# Altium PCB TMC2160_BOB_V1_0.PcbDoc
Units mil, origin at the board's own origin, x right, y up, seen from the top; angles counter-clockwise.
Board outline 1500 x 1100 mil, 4 copper layers (Top, GND, VM, Bottom), stack 63.504 mil thick; 46 components, 52 nets, 171 pads, 147 vias.
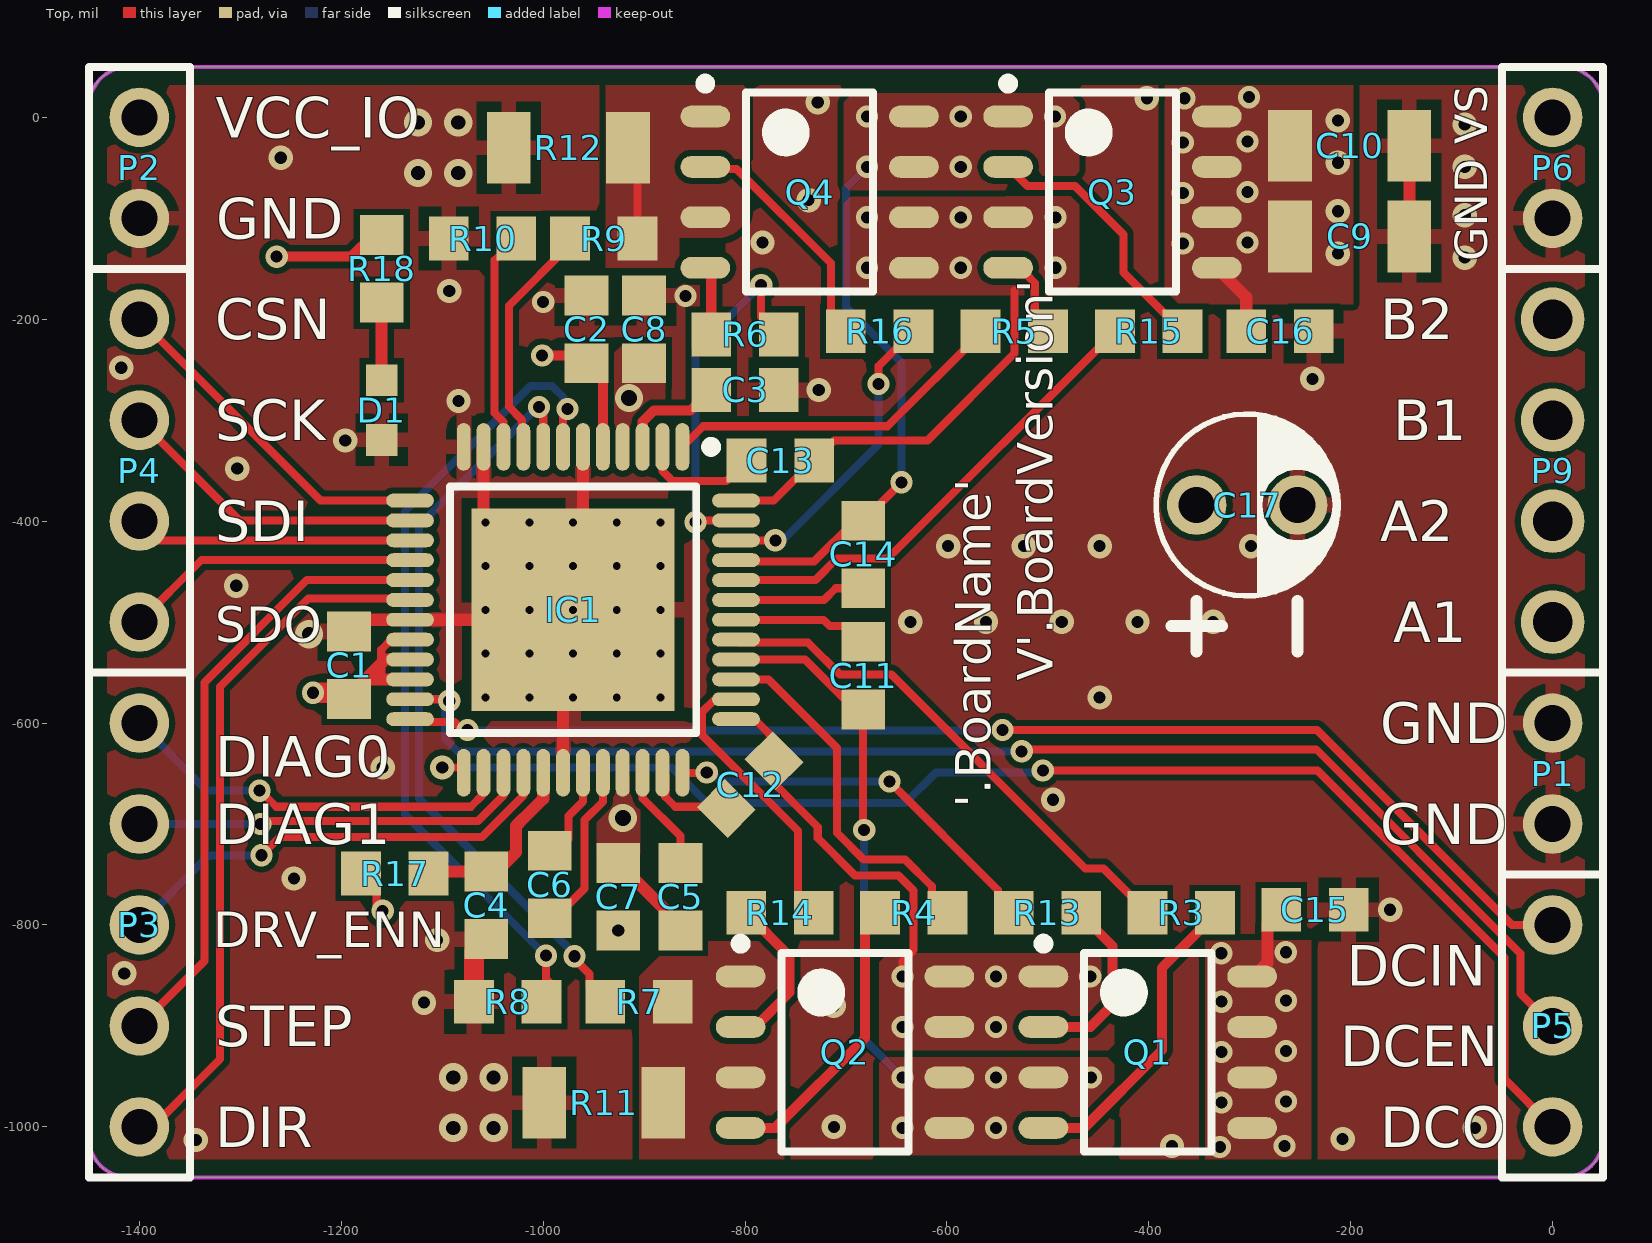
[diagram p0: Top view]
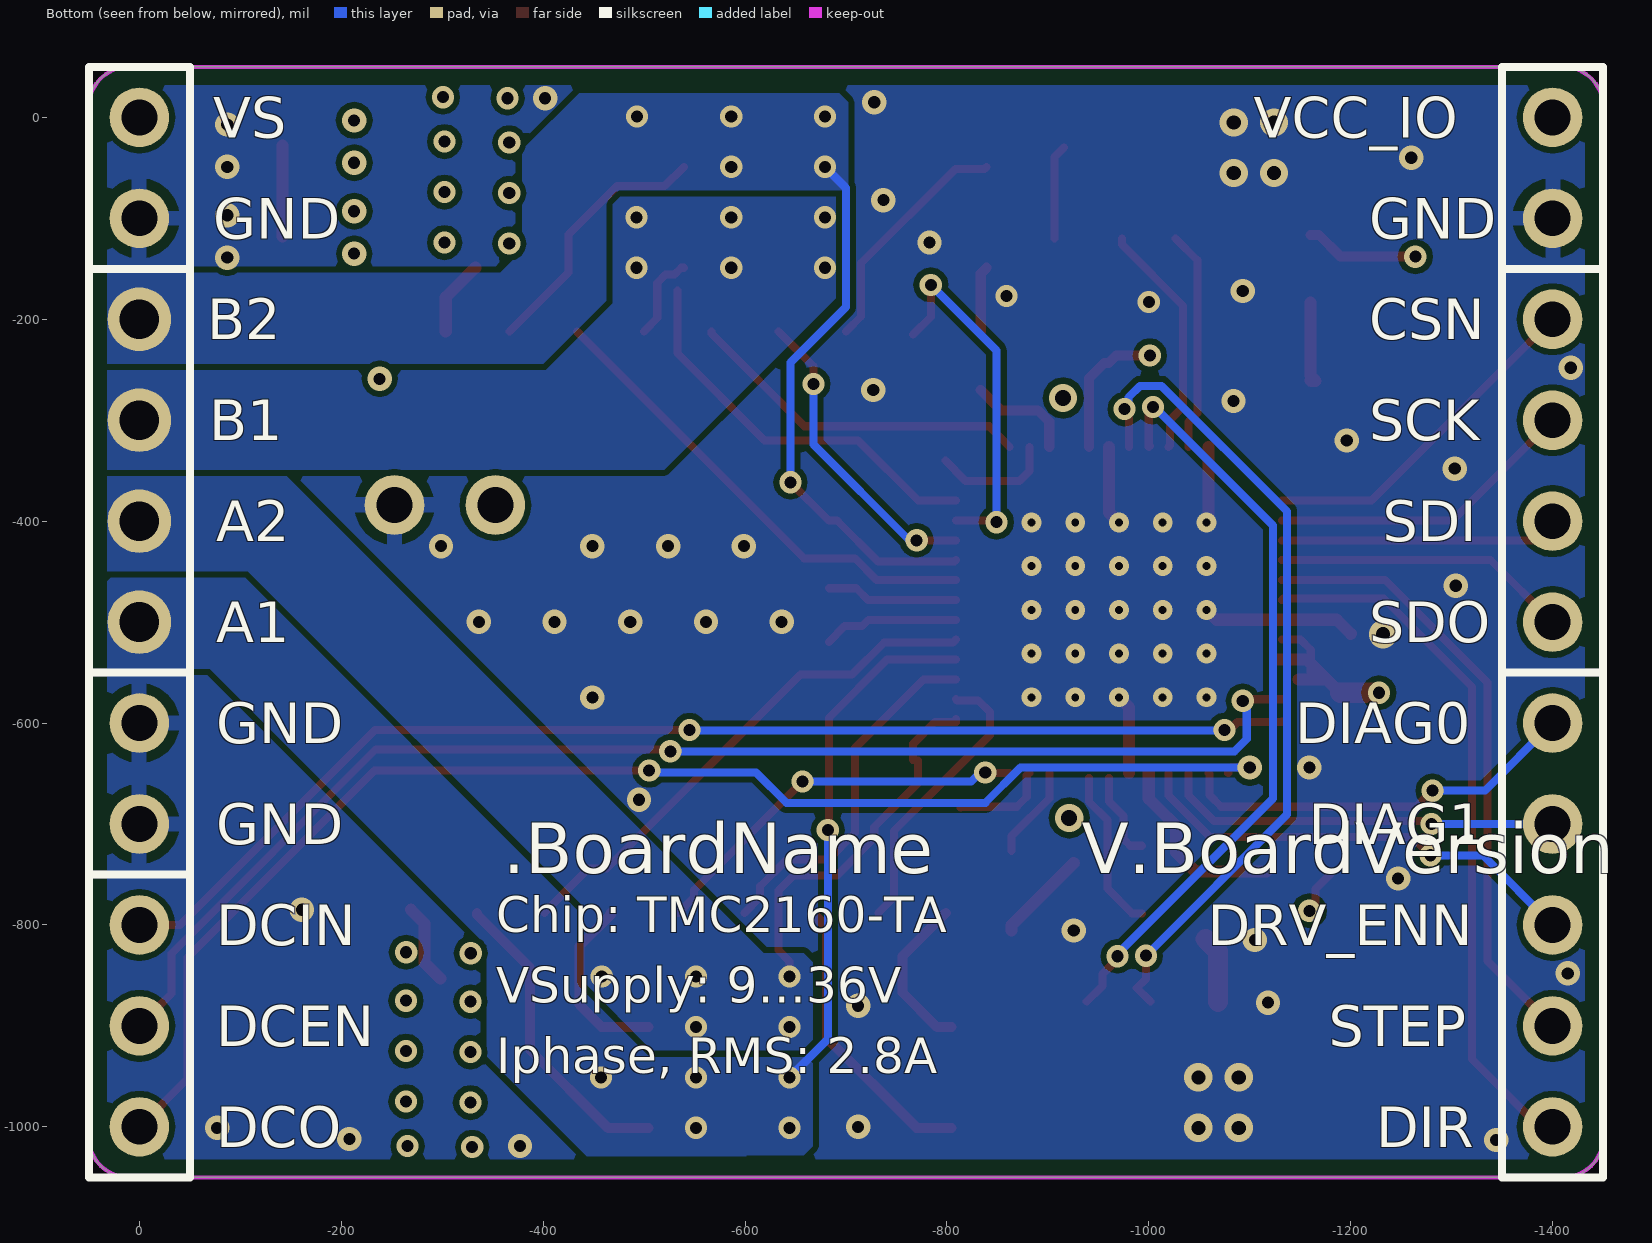
[diagram p1: Bottom view, seen from below]
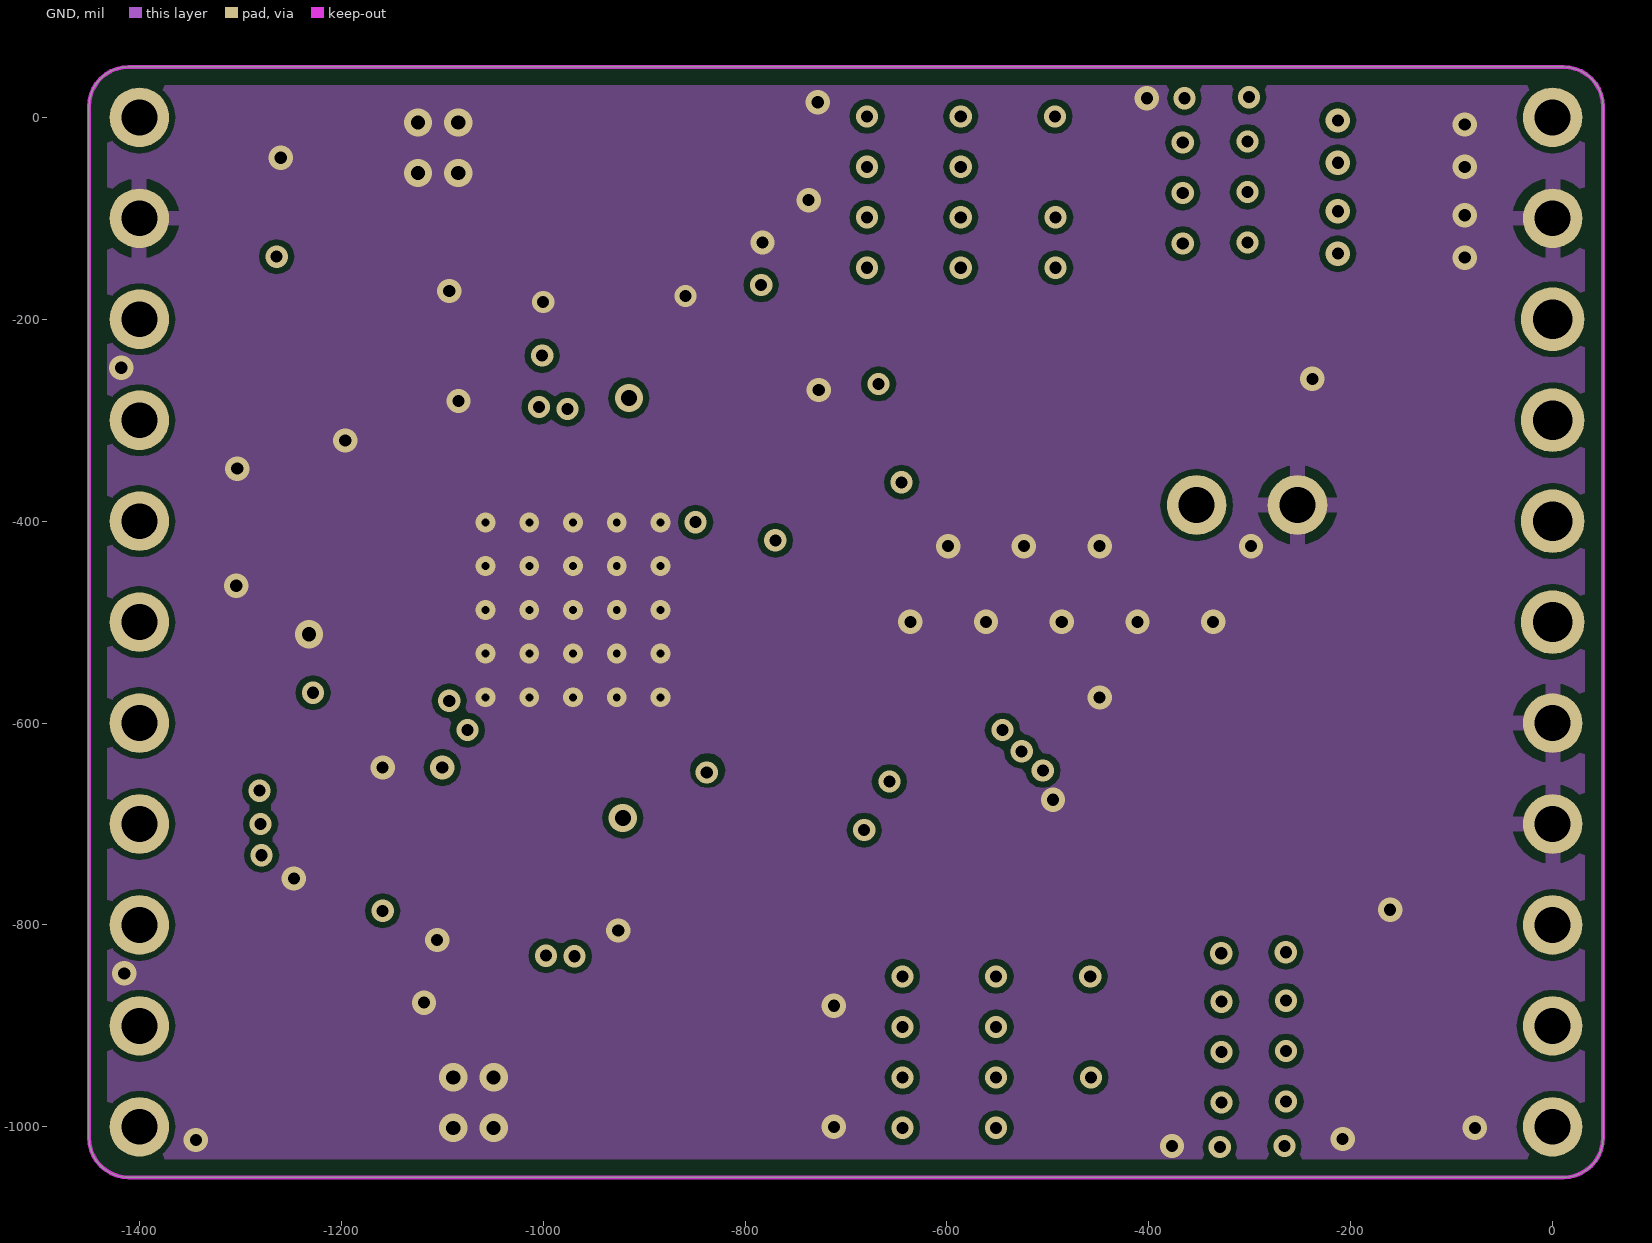
[diagram p2: GND]
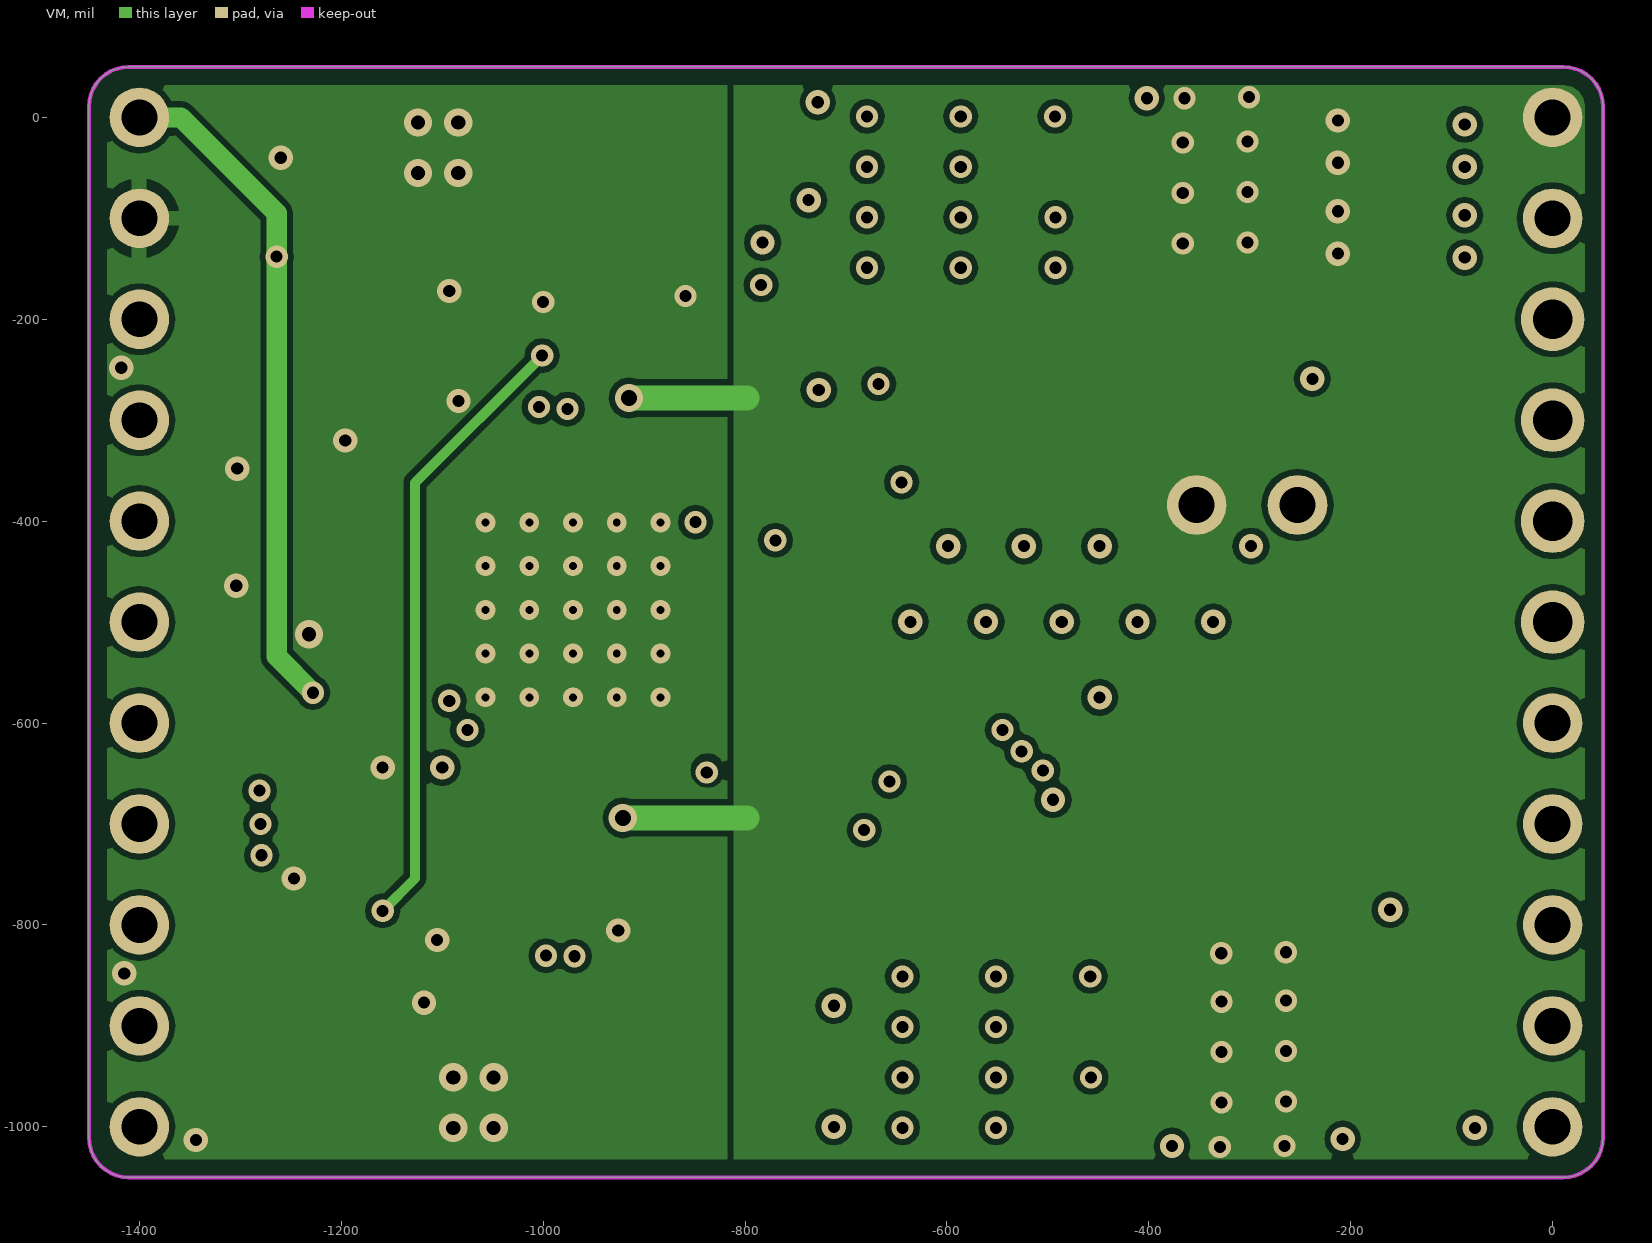
[diagram p3: VM]
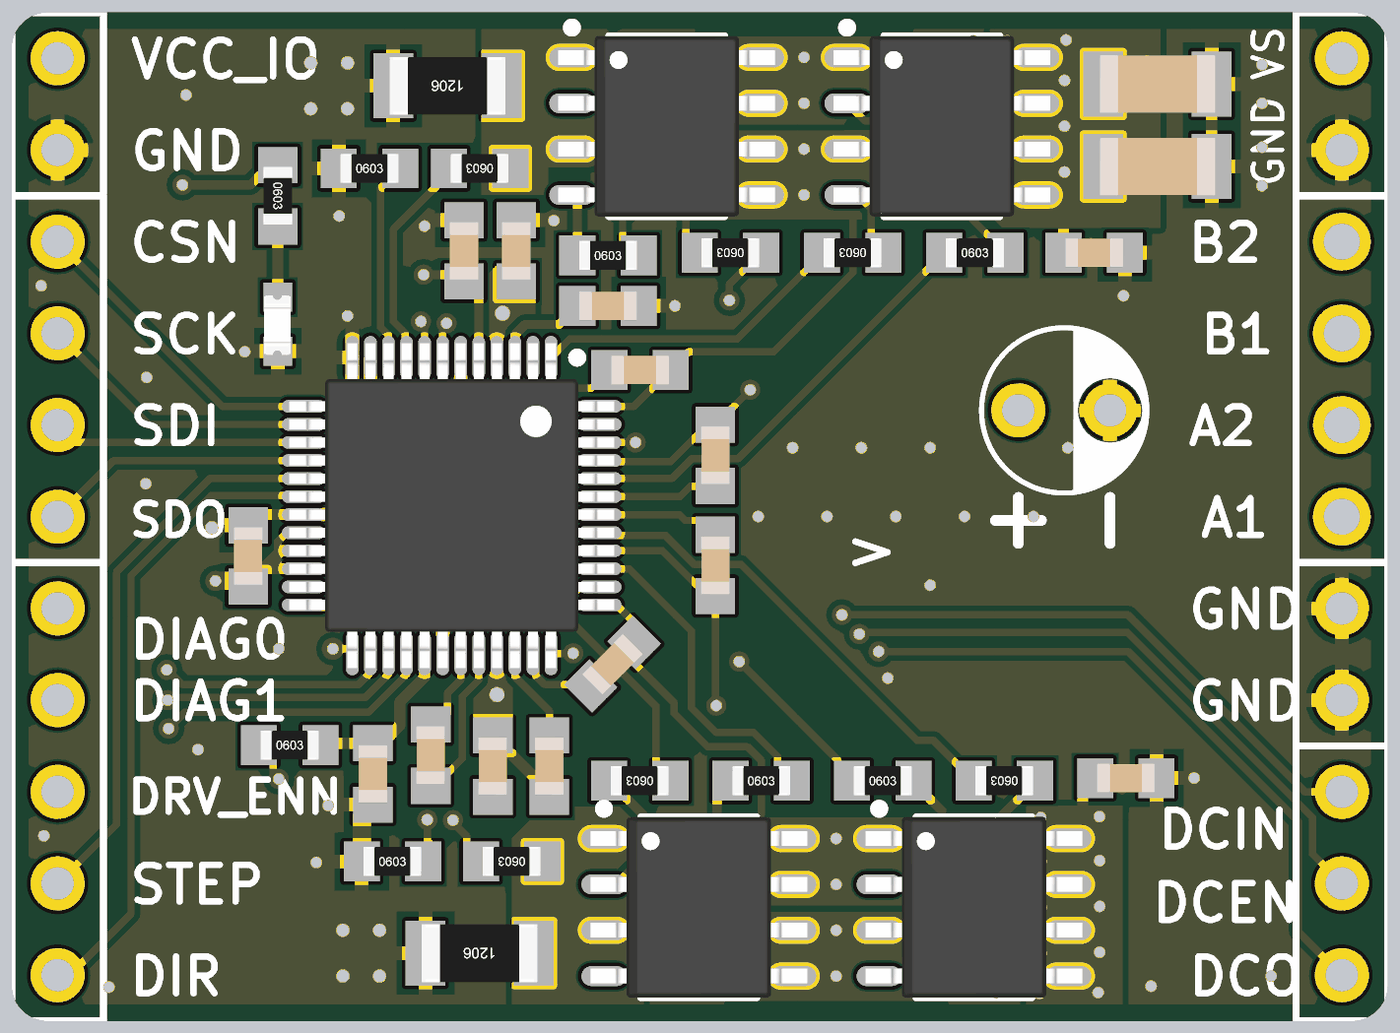
[diagram p4: 3D render of the assembled board from above, using the file's embedded part models]

## Layer stack, top to bottom
Top Solder: solder mask 0.4, Solder Resist, Dk 3.5
Top: signal copper 0.689
Dielectric 1: core 10, FR-4, Dk 4.8
GND: signal copper 1.378
Dielectric 2: prepreg 39.3701, FR-4, Dk 4.2
VM: signal copper 1.378
Dielectric4: core 10, FR-4, Dk 4.2
Bottom: signal copper 0.689
Bottom Solder: solder mask 0.4, Solder Resist, Dk 3.5

## Board outline
-1450,-1010.63 ccw(c-1410.63,-1010.63) -1410.63,-1050 10.63,-1050 ccw(c10.63,-1010.63) 50,-1010.63 50,10.63 ccw(c10.63,10.63) 10.63,50 -1410.63,50 ccw(c-1410.63,10.63) -1450,10.63

## Design rules (kind name [scope] priority, off if disabled: settings)
Clearance BoardOutlineClearance [OnLayer('Keep-Out Layer')] p1: gap=15.75 ignorepadtopadclearanceinfootprint=FALSE except(0: Arc-Hole Track-Hole SMDPad-Hole THPad-Hole Via-Hole Fill-Hole Poly-Hole Region-Hole Text-Hole)
Clearance "Fiducial Clearance" [HasFootprint('FIDUCIAL_40MIL')] p2: gap=26 ignorepadtopadclearanceinfootprint=FALSE except(0: Arc-Hole Track-Hole SMDPad-Hole THPad-Hole Via-Hole Fill-Hole Poly-Hole Region-Hole Text-Hole)
Clearance "Mounting Hole Clearance" [(HoleDiameter >= 110) And  IsPad  And ((PadYSize_AllLayers - HoleDiameter)  <=  1)] p3: gap=30 ignorepadtopadclearanceinfootprint=FALSE except(0: Arc-Hole Track-Hole SMDPad-Hole THPad-Hole Via-Hole Fill-Hole Poly-Hole Region-Hole Text-Hole)
Clearance [All] p4: gap=6 ignorepadtopadclearanceinfootprint=TRUE except(0: Arc-Hole Track-Hole SMDPad-Hole THPad-Hole Via-Hole Fill-Hole Poly-Hole Region-Hole Text-Hole)
ComponentClearance Pinheader2PinheaderClearance [InComponentClass('Pinheader') vs InComponentClass('Pinheader')] p1: gap=0 collisioncheckmode=3 verticalgap=0 showdistances=FALSE
ComponentClearance [All] p2: gap=0 collisioncheckmode=3 verticalgap=100000 showdistances=FALSE
DiffPairsRouting [All] p1 off: maxlimit=10 minlimit=7.5 mostfreqgap=10 toplayer_prefgap=7.5 toplayer_minwidth=7.5 toplayer_maxwidth=7.5 toplayer_prefwidth=7.5 midlayer1_prefgap=7.5 midlayer1_minwidth=7.5 midlayer1_maxwidth=7.5 midlayer1_prefwidth=7.5 midlayer2_mingap=10 midlayer2_minwidth=15 midlayer2_maxwidth=15 midlayer2_prefwidth=15 bottomlayer_prefgap=7.5 bottomlayer_minwidth=7.5 bottomlayer_maxwidth=7.5 bottomlayer_prefwidth=7.5 maxuncoupledlength=500
HoleSize [All] p1: absolutevalues=TRUE maxlimit=100000 minlimit=7.87 maxpercent=80.000 minpercent=20.000
HoleToHoleClearance [All] p1: gap=8 allowstackedmicrovias=TRUE
MatchedLengths "SD_CARD MatchedLengths" [InNetClass('SD_CARD')] p1: tolerance=10 checknetsindiffpair=FALSE checkdiffpairvsdiffpair=TRUE checkxsignals=TRUE checkothers=TRUE
MinimumAnnularRing MinimumViaAnnualRing [All] p1: minimumring=4.92
MinimumSolderMaskSliver STM32_MinimumSolderMaskSliver [(InComponent('STM1') AND InComponent('STM2')) vs (InComponent('STM1') AND InComponent('STM2'))] p1: minsoldermaskwidth=1
MinimumSolderMaskSliver USB_HUB_MinimumSolderMaskSliver [InComponent('USB_HUB')] p2: minsoldermaskwidth=1
MinimumSolderMaskSliver [All] p3 off: minsoldermaskwidth=1.5
PasteMaskExpansion TestPadPasteMaskExpansion [HasFootprint('SMD_TP_2X2_ROUND')] p1: expansion=-78.74
PasteMaskExpansion [All] p2: expansion=0
PolygonConnect SA_SB_PolygonConnect [InNet('SA') OR InNet('SB')] p1: connectstyle=Direct reliefconductorwidth=70 reliefentries=4 polygonreliefangle="90 Angle" airgapwidth=10
PolygonConnect VM_PolygonConnect [InNet('+VM')] p2: connectstyle=Direct reliefconductorwidth=70 reliefentries=4 polygonreliefangle="90 Angle" airgapwidth=10
PolygonConnect ThermalVias [IsVia] p3: connectstyle=Direct reliefconductorwidth=10 reliefentries=4 polygonreliefangle="90 Angle" airgapwidth=10
PolygonConnect MotorOutputConStyle [InNetClass('MotorPowerOut')] p4: connectstyle=Direct reliefconductorwidth=10 reliefentries=4 polygonreliefangle="90 Angle" airgapwidth=10
PolygonConnect [All] p5: connectstyle=Relief reliefconductorwidth=15 reliefentries=4 polygonreliefangle="90 Angle" airgapwidth=10
RoutingVias [All] p1: holewidth=12 width=22 viastyle="Through Hole" minholewidth=12 minwidth=22 maxholewidth=12 maxwidth=50
ShortCircuit [All] p1 off: allowed=FALSE
SilkToBoardRegionClearance [All] p1 off:
SilkToSilkClearance [All] p1 off: silktosilkclearance=10
SilkToSolderMaskClearance [IsPad] p1 off: minsilkscreentomaskgap=10 clearancetoexposedcopper=TRUE
SolderMaskExpansion FiducialSolderMaskExpansion [HasFootprint('FIDUCIAL_40MIL')] p1: expansion=26
SolderMaskExpansion [All] p2: expansion=4
UnRoutedNet [All] p1 off:
Width VIN_Width [InNetClass('PWR_VIN')] p1: maxlimit=300 minlimit=200 preferedwidth=210
Width Other_Width [All] p2: maxlimit=100000 minlimit=8 preferedwidth=11.81 minimp=50.000000 maximp=50.000000 favimp=50.000000
19 further rules are at their usual default settings.

## Classes and differential pairs
net class MotorPowerOut: BMA1 BMA2 BMB1 BMB2

## Components (designator, comment, footprint, x,y, rotation, side; value= is the part's Value field where it differs from the comment)
C1 "100nF" C0603 -1192.26,-542.78 r90 top
C2 "2u2" C0603 -957,-210 r90 top
C3 "2u2" C0603 -800,-270 r180 top
C4 "470nF" C0603 -1056.33,-780.54 r270 top
C5 "100nF" C0603 -864,-772 r90 top
C6 "22nF" C0603 -993.33,-760 r270 top
C7 "100nF" C0603 -925.67,-772 r270 top
C8 "100nF" C0603 -900,-210 r90 top
C9 "10uF/50V/10%" C1206 -201,-118 r180 top
C10 "10uF/50V/10%" C1206 -201,-28 r180 top
C11 "220nF" C0603 -683,-553 r270 top
C12 "220nF" C0603 -795.06,-661 r45 top
C13 "220nF" C0603 -765,-340 r0 top
C14 "220nF" C0603 -683,-433 r90 top
C15 "470nF/50V" C0603 -235.46,-785 r0 top
C16 "470nF/50V" C0603 -270,-212 r0 top
C17 "Cap Pol1" EXT_POL_CAP -352.68,-384 r270 top value="ELKO 100uF/low-ESR"
D1 "LED, Blue, SMD, 20mA, 2.8V, 465 nm" LED_0603 -1160,-290 r270 top
IC1 "TMC2160-TA" TMC5160_TSQFP50P900X900X120_HS-49L -970.42,-487.87 r270 top
P1 "GND" 2_PIN_THT 0,-700 r0 top
P2 "VCC_IO" 2_PIN_THT -1400,-100 r0 top
P3 "MISC" 5_PIN_THT -1400,-1000 r0 top
P4 "SPI" 4_PIN_THT -1400,-200 r180 top
P5 "DCSTEP" 3_PIN_THT 0,-1000 r0 top
P6 "VM" 2_PIN_THT 0,-100 r0 top
P9 "MAB" 4_PIN_THT_1mm_hole 0,-200 r180 top
Q1 "AO4882" SOP127P600X170-8L -401.03,-926 r0 top
Q2 "AO4882" SOP127P600X170-8L -701.03,-926 r0 top
Q3 "AO4882" SOP127P600X170-8L -436.03,-74 r0 top
Q4 "AO4882" SOP127P600X170-8L -736.03,-74 r0 top
R3 "22R / 100mW / 1%" R0603 -367.97,-788 r180 top
R4 "22R / 100mW / 1%" R0603 -632.96,-788 r0 top
R5 "22R / 100mW / 1%" R0603 -533.33,-212 r180 top
R6 "22R / 100mW / 1%" R0603 -800,-215 r0 top
R7 "47R /  / 1%" R0603 -905,-876 r180 top
R8 "47R /  / 1%" R0603 -1035,-876 r0 top
R9 "47R /  / 1%" R0603 -940,-120 r180 top
R10 "47R /  / 1%" R0603 -1060,-120 r0 top
R11 "75mR" R1206 -940,-976 r180 top
R12 "75mR" R1206 -975,-30 r180 top
R13 "22R / 100mW / 1%" R0603 -500.47,-788 r0 top
R14 "22R / 100mW / 1%" R0603 -765.46,-788 r180 top
R15 "22R / 100mW / 1%" R0603 -400,-212 r0 top
R16 "22R / 100mW / 1%" R0603 -666.67,-212 r180 top
R17 "2R2/1%/" R0603 -1147,-749.04 r0 top
R18 "1k" R0603 -1160,-150 r270 top

## Footprints (in the part's own frame and the unit in brackets; to place one, negate y for a bottom-side part, rotate by r counter-clockwise, add the part's x,y. Pads: shape width x height; smd on the part's side, far side on the other; paste and mask are expansions set on the pad)
2_PIN_THT [mm]
  round 1.5 hole 0.9: 1(0,0) 2(0,2.54)
  silkscreen extent -1.27,-1.27 1.27,3.81
3_PIN_THT [mm]
  round 1.5 hole 0.9: 1(0,0) 2(0,2.54) 3(0,5.08)
  silkscreen extent -1.27,-1.27 1.27,6.35
4_PIN_THT [mm]
  round 1.5 hole 0.9: 1(0,0) 2(0,2.54) 3(0,5.08) 4(0,7.62)
  silkscreen extent -1.27,-1.27 1.27,8.89
4_PIN_THT_1mm_hole [mm]
  round 1.6 hole 1: 1(0,0) 2(0,2.54) 3(0,5.08) 4(0,7.62)
  silkscreen extent -1.27,-1.27 1.27,8.89
5_PIN_THT [mm]
  round 1.5 hole 0.9: 1(0,0) 2(0,2.54) 3(0,5.08) 4(0,7.62) 5(0,10.16)
  silkscreen extent -1.27,-1.27 1.27,11.43
C0603 [mm] "0603 ceramic capacitor"
  rect 1x1.1 smd: 1(-0.85,0) 2(0.85,0)
  body extent -0.8,-0.4 0.8,0.4, height 0.8
C1206 [mm] "1206 ceramic capacitor"
  rect 1.1x1.8 smd: 1(-1.5,0) 2(1.5,0)
  body extent -1.6,-0.8 1.6,0.8, height 0.76
EXT_POL_CAP [mm]
  round 1.5 hole 0.9: 1(0,0) 2(0,2.54)
  silkscreen extent -2.29,-1.02 3.68,3.56
LED_0603 [mm]
  rect 0.8x0.8 smd: 1(-0.75,0) 2(0.75,0)
  body extent -0.8,-0.38 0.85,0.35, height 0.68
R0603 [mm] "0603 resistor"
  rect 1x1.1 smd: 1(-0.85,0) 2(0.85,0)
  body extent -0.8,-0.4 0.8,0.4, height 0.45
R1206 [mm] "1206 resistor"
  rect 1.1x1.8 smd: 1(-1.5,0) 2(1.5,0)
  body extent -1.6,-0.8 1.6,0.8, height 0.6
SOP127P600X170-8L [mm] "SOP, 8-Leads, Body 4,90x3,90mm, Pitch 1,27mm, IPC High Density"
  oval 1.25x0.55 smd: 1(-2.625,1.905) 2(-2.625,0.635) 3(-2.625,-0.635) 4(-2.625,-1.905) 5(2.625,-1.905) 6(2.625,-0.635) 7(2.625,0.635) 8(2.625,1.905)
  silkscreen extent -2.75,-2.5 1.6,2.85, body extent -3,-2.5 3,2.5, height 1.7
TMC5160_TSQFP50P900X900X120_HS-49L [mm] "TSQFP, 48-Leads, Body 7,00x7,00mm, Pitch 0,50mm, Thermal Pad 5,10x5,10mm, IPC High Density"
  oval 1.2x0.35 smd mask+0.102: 1(-4.1,2.75) 2(-4.1,2.25) 3(-4.1,1.75) 4(-4.1,1.25) 5(-4.1,0.75) 6(-4.1,0.25) 7(-4.1,-0.25) 8(-4.1,-0.75) 9(-4.1,-1.25) 10(-4.1,-1.75) 11(-4.1,-2.25) 12(-4.1,-2.75) 25(4.1,-2.75) 26(4.1,-2.25) 27(4.1,-1.75) 28(4.1,-1.25) 29(4.1,-0.75) 30(4.1,-0.25) 31(4.1,0.25) 32(4.1,0.75) 33(4.1,1.25) 34(4.1,1.75) 35(4.1,2.25) 36(4.1,2.75)
  oval 0.35x1.2 smd mask+0.102: 13(-2.75,-4.1) 14(-2.25,-4.1) 15(-1.75,-4.1) 16(-1.25,-4.1) 17(-0.75,-4.1) 18(-0.25,-4.1) 19(0.25,-4.1) 20(0.75,-4.1) 21(1.25,-4.1) 22(1.75,-4.1) 23(2.25,-4.1) 24(2.75,-4.1) 37(2.75,4.1) 38(2.25,4.1) 39(1.75,4.1) 40(1.25,4.1) 41(0.75,4.1) 42(0.25,4.1) 43(-0.25,4.1) 44(-0.75,4.1) 45(-1.25,4.1) 46(-1.75,4.1) 47(-2.25,4.1) 48(-2.75,4.1)
  rect 5.1x5.1 smd: 49(0,0)
  silkscreen extent -4.22,-3.1 3.1,3.6, body extent -4.5,-4.5 4.5,4.5, height 1.2

## Part data
C1 C7 C8: library part Capacitor, "Ceramic capacitor", Manufacturer=Multicomp, MPN=MC0603F104M500CT, Voltage rating=50V, Capacitance=100nF, ComponentLinknDescription=Datasheet, Precision=20%, Type=MLCC
C2 C3: library part "2.2 µF, 25 V, ± 10%, X5R, GRM Series", "SMD Multilayer Ceramic Capacitor, 0603 [1608 Metric], 2.2 µF, 25 V, ± 10%, X5R, GRM Series", MPN=GRM188R61E225KA12D, Voltage rating=50V, Capacitance=2u2, ComponentLinknDescription=Datasheet, MF=MURATA, Precision=10%, Type=MLCC
C4: library part Capacitor, "Ceramic capacitor", MPN=MC0603X474K160CT, Voltage rating=16V, Capacitance=470nF, ComponentLinknDescription=Datasheet, MF=Multicomp, Precision=10%, Type=MLCC
C5: library part Capacitor, "Ceramic capacitor", MPN=MC0603F104M500CT, Voltage rating=50V, Capacitance=100nF, ComponentLinknDescription=Datasheet, MF=Multicomp, Precision=20%, Type=MLCC
C6: library part Capacitor, "Ceramic capacitor", MPN=MC0603B223K500CT, Voltage rating=50V, Capacitance=22nF, ComponentLinknDescription=Datasheet, MF=Multicomp, Precision=20%, Type=MLCC
C9 C10: library part "10 µF, 50 V, ± 20%, X5R, GRM Series", "SMD Multilayer Ceramic Capacitor, 1206 [3216 Metric], 10 µF, 50 V, ± 20%, X5R, GRM Series", Capacitance=10uF, MPN=GRM31CR61H106MA12L, VoltageRating=50V, ComponentLinknDescription=Datasheet, MF=MURATA, Precision=10%, Type=MLCC
C11 C12 C13 C14: library part "0.22 µF, 50 V, ± 10%, X7R", "SMD Multilayer Ceramic Capacitor, 0603 [1608 Metric], 0.22 µF, 50 V, ± 10%, X7R, GCM Series", MPN=GCM188R71H224KA64D, Voltage rating=50V, Capacitance=220nF, ComponentLinknDescription=Datasheet, MF=MURATA, Precision=10%, Type=MLCC
C15 C16: library part "0.47 µF, 50 V, ± 10%, X7R, C Series", "SMD Multilayer Ceramic Capacitor, 0603 [1608 Metric], 0.47 µF, 50 V, ± 10%, X7R, C Series", Capacitance=470nF, MPN=C1608X7R1H474K080AC, VoltageRating=50V, ComponentLinknDescription=Datasheet, MF=TDK, Precision=10%, Type=MLCC
C17: "Polarized Capacitor (Radial)", LatestRevisionDate=17-Jul-2002, LatestRevisionNote="Re-released for DXP Platform.", PackageDescription="Polarized Capacitor (Radial); 2 Leads", PackageReference=RB7.6-15, Published=8-Jun-2000, Publisher="Altium Limited"
D1: Colour=Blue, Current rating=20mA, MPN=LTST-C191TBKT-5A, MF=Lite-On
IC1: Manufacturer=TRINAMIC, Distributor#1=Digikey, Geometry.Height=1,2mm, MF=TRINAMIC, MPN=TMC2160-TA
P1 P2 P6: library part "Header 2", "Header, 2-Pin", ComponentClass=Pinheader, Fitted="Not fitted", LatestRevisionDate=17-Jul-2002, LatestRevisionNote="Re-released for DXP Platform.", Publisher="Altium Limited"
P3: library part "Header 5", "Header, 5-Pin", Fitted="Not fitted", LatestRevisionDate=17-Jul-2002, LatestRevisionNote="Re-released for DXP Platform.", Publisher="Altium Limited"
P4: library part "Header 4", "Header, 4-Pin", ComponentClass=Pinheader, Fitted="Not fitted", LatestRevisionDate=17-Jul-2002, LatestRevisionNote="Re-released for DXP Platform.", Publisher="Altium Limited"
P5: library part "Header 3", "Header, 3-Pin", Fitted="Not fitted", LatestRevisionDate=17-Jul-2002, LatestRevisionNote="Re-released for DXP Platform.", Publisher="Altium Limited"
P9: library part "Wire-To-Board Connector, 2.5 mm, 4 Contacts, Header, EH Series, Through Hole, 1 Rows", "Wire-To-Board Connector, 2.5 mm, 4 Contacts, Header, EH Series, Through Hole, 1 Rows", MPN=B4B-EH-A, Fitted="Not fitted", MF="JST (JAPAN SOLDERLESS TERMINALS)"
Q1 Q2 Q3 Q4: library part "AO4882 MOSFET 2N-CH 40V 8A 8SOIC", "Mosfet Array 2 N-Channel (Dual) 40V 8A 2W Surface Mount 8-SOIC", MF="Alpha & Omega Semiconductor Inc.", MPN=AO4882
R3 R4 R5 R6 R13 R14 R15 R16: library part "22 ohm, 50 V, 0603 [1608 Metric], 100 mW, ± 1%, MCWR Series", "SMD Chip Resistor, Thick Film, 22 ohm, 50 V, 0603 [1608 Metric], 100 mW, ± 1%, MCWR Series", MPN=MCWR06X22R0FTLV, PowerRating=100mW, Resistance=22R, Temp coefficient=*ppm, MF=MULTICOMP, Precision=1%
R7 R8 R9 R10: library part "47 ohm, 75 V, 0603 [1608 Metric], 100 mW, ± 1%, MCSR 06 Series", "SMD Chip Resistor, Ceramic, 47 ohm, 75 V, 0603 [1608 Metric], 100 mW, ± 1%, MCSR 06 Series", MPN=MCSR06X47R0FTL, Resistance=47R, Temp coefficient=*ppm, MF=MULTICOMP, Precision=1%
R11 R12: library part "R_SENS, 0.075 ohm, 1206, 1W, ± 1%, ERJ Series", "SMD Chip Resistor, Thick Film, Current Sense Resistors - SMD 1W 0.075ohm 1%", MPN=ERJ-8BWFR075V, PowerRating=1W, Temp coefficient=*ppm, VoltageRating=50V, MF="Panasonic Electronic Components", Precision=1%, Resistance=75mR
R17: library part Resistor, "Resistor", MPN=MC0063W060312R2, Power rating=*mW, Resistance=2R2, Temp coefficient=*ppm, Voltage rating=*V, ComponentLinknDescription=Datasheet, MF=Multicomp, Precision=1%
R18: library part "1 kohm, 50 V, 0603 [1608 Metric], 63 mW, ± 1%, MC Series", "1 kohm, 50 V, 0603 [1608 Metric], 63 mW, ± 1%, MC Series", MPN=MC0063W060311K, PowerRating=63mW, Temp coefficient=*ppm, VoltageRating=50V, MF=MULTICOMP, Precision=1%, Resistance=1k

## Via types
v1: diameter 22, hole 12, Top to Bottom, tented both sides, 65 vias
v2: diameter 24.1, hole 12, Top to Bottom, tented both sides, 29 vias
v3: diameter 19.68, hole 7.87, Top to Bottom, tented bottom, 25 vias
v4: diameter 24, hole 12, Top to Bottom, tented both sides, 17 vias
v5: diameter 28, hole 14, Top to Bottom, tented both sides, 9 vias
v6: diameter 28, hole 16, Top to Bottom, tented both sides, 2 vias

## Nets (pads, with @x,y where several pads share a name; then routed paths per layer and width w, separated by ;. In a path a pad name is that pad's centre, name@x,y a point inside that pad or via, vN(x,y) a via of type N, cw(c..) or ccw(c..) an arc to the next point about the centre after c; other vN are vias at no path point)
5V_OUT: C2.1 IC1.5 R17.1 | length 798.9
  Top w8: R17.1 -1165,-764.5 -1165,-780 v1(-1159,-786)
  Top w10: v1(-1001,-236) -967.46,-236 -960,-243.46 -955.57,-243.46 -940.89,-258.15 IC1.5
  VM w10: v1(-1159,-786) -1127,-754 -1127,-362 v1(-1001,-236)
12VOUT: C3.2 IC1.3 | length 106.3
  Top w10: IC1.3 -901.32,-326.45 -901.32,-301.32 -890.23,-290.23 -854.08,-290.23 -853.88,-290.42 C3.2
+VM: C5.1 C7.1 C8.1 C9.2 C10.2 C15.1 C16.1 C17.1 IC1.4 IC1.33 P6.2 Q1.5 Q1.6 Q1.7 Q1.8 Q3.5 Q3.6 Q3.7 Q3.8 | length 487.7
  Top w12: C7.1 -864,-800.2 C5.1 ; Q3.5 -303.46,-178.22 C16.1 ; Q1.8@-298,-853 -282.61,-837.61 -282.61,-798.69 C15.1
  VM w25: v6(-921.06,-694) -798,-694 ; v6(-915.06,-278) -798,-278
  other v1: -329.68,-1020 -265.68,-1019 -328,-976 -264,-975 -328,-926 -264,-925 -328,-876 -264,-875 -328.32,-828 -264.32,-827 -366.37,-125 -302.37,-124 -366.37,-75 -302.37,-74 -366.37,-25 -302.37,-24 -364.68,19 -300.68,20
  other v4: -212.79,-135 -212.79,-93 -212.79,-45 -212.79,-3
BMA1: C11.2 IC1.40 P9.4 Q1.3 Q2.5 Q2.6 | length 522.8
  Top w8: IC1.40 -740.74,-537.08 -683,-594.81 -683,-705 v1(-682,-706)
  Bottom w8: v1(-682,-706) -682,-911.69 -682.68,-912.37 v1(-644.06,-951)
  other v1: -644.06,-1001 -551.31,-1001 -551.31,-951 -457.44,-951
BMA2: C12.2 IC1.37 P9.3 Q1.1 Q2.7 Q2.8 | length 371
  Top w8: IC1.37 -809,-599.02 -787.98,-599.02 -766.34,-620.66 C12.2@-766.34,-636.34 ; C12.2 -771.39,-659.61 -728,-703 -728,-714 -691,-751 -647.95,-751 -633,-765.95 -633,-825 -644.06,-836.06 v1(-644.06,-851)
  other v1: -644.06,-901 -551.31,-901 -551.31,-851 -458.01,-851
BMB1: C13.2 IC1.48 P9.2 Q3.3 Q4.5 Q4.6 | length 398.7
  Top w8: IC1.48 -771.6,-379.6 -712,-320 -619.32,-320 -533,-233.68 -533,-171.38
  other v1: -679.06,-149 -586.31,-149 -492.44,-149 -679.06,-99 -586.31,-99 -492.44,-99
BMB2: C14.2 IC1.45 P9.1 Q3.1 Q4.7 Q4.8 | length 541.1
  Top w8: IC1.45 -807.68,-439.97 -731.78,-439.97 -691.35,-399.54 C14.2 v1(-645,-361.54)
  Bottom w8: v1(-679.06,-49) -700.06,-70 -700.06,-187.74 -645,-242.8 v1(-645,-361.54)
  other v1: -586.31,-49 -679.06,1 -586.31,1 -493.01,1
CA1: C11.1 IC1.42 | length 135
  Top w8: IC1.42 -722.35,-497.71 -716.06,-504 -698.54,-504 C11.1
CA2: C12.1 IC1.35 | length 94.7
  Top w8: IC1.35 -879.04,-652.08 -879.04,-673.01 -869.14,-682.9 -814.42,-682.9 C12.1@-813.66,-683.66
CB1: C13.1 IC1.2 | length 119.5
  Top w8: IC1.2 -881.83,-350.21 -871.97,-360.07 -818.53,-360.07 C13.1
CB2: C14.1 IC1.43 | length 130.8
  Top w8: IC1.43 -721.71,-478.02 -710.15,-466.46 C14.1
CSN: IC1.13 P4.1 | length 342.6
  Top w8: P4.1 -1220.4,-379.6 IC1.13
DCEN: IC1.23 P5.2 | length 1326.6
  Top w8: IC1.23 -1094.55,-576.45 v1(-1093,-578) ; v1(-526,-628) -528,-628 -530,-626 -234.2,-626 -32,-828.2 -32,-868 P5.2
  Bottom w8: v1(-1093,-578) -1093,-581.79 -1097,-585.79 -1097,-615.82 -1084.82,-628 v1(-526,-628)
DCIN: IC1.24 P5.3 | length 1221.4
  Top w8: IC1.24@-1131.83,-598.26 -1131.09,-599 -1087.66,-599 -1076,-610.66 -1075,-609.66 v1(-1075,-607) ; v1(-545,-607) -233.4,-607 -40.4,-800 P5.3
  Bottom w8: v1(-1075,-607) -1075.5,-607.5 -545.5,-607.5 v1(-545,-607)
DCO: IC1.25 P5.1 | length 1369.3
  Top w8: v2(-1100,-644) -1081.35,-644 -1078.68,-646.67 IC1.25 ; v1(-505,-647) -233,-647 -47.68,-832.31 -47.68,-952.32 P5.1
  Bottom w8: v2(-1100,-644) -873,-644 -838,-679 -641,-679 -611,-649 -507,-649 v1(-505,-647)
DIAG0: IC1.26 P3.5 | length 401.5
  Top w8: v1(-1281,-667) -1280.28,-667 -1264.38,-682.9 -1071.69,-682.9 -1060.1,-671.32 -1060.1,-650.39 IC1.26
  Bottom w8: P3.5 -1333,-667 v1(-1281,-667)
DIAG1: IC1.27 P3.4 | length 394.9
  Top w8: v1(-1280,-700) -1277,-697 -1064.53,-697 -1039.31,-671.78 IC1.27
  Bottom w8: P3.4 v1(-1280,-700)
DIR: IC1.18 P3.1 | length 707
  Top w8: P3.1@-1400,-1013 -1320,-933 -1320,-564 -1232.71,-476.71 -1133.15,-476.71 IC1.18
DRV_ENN: IC1.28 P3.3 | length 456
  Top w8: v1(-1279,-731) -1261,-713 -1060.73,-713 -1019.63,-671.89 IC1.28
  Bottom w8: P3.3 -1331,-731 v1(-1279,-731)
GND: C1.2 C2.2 C3.1 C4.2 C7.2 C8.2 C9.1 C10.1 C15.2 C16.2 C17.2 D1.2 IC1.6 IC1.11 IC1.12 IC1.19 IC1.30 IC1.49 P1.1 P1.2 P2.1 P6.1 R8.1 R10.1 R11.2 R12.2 | length 543.2
  Top w12: C1.2@-1200,-511.54 -1186.17,-497.71 IC1.19 -1066.87,-497.71 v3(-1057.03,-487.87) ; IC1.11 -1059,-399.28 v3(-1057.03,-401.25) ; IC1.30 -980.26,-584.32 v3(-970.42,-574.48) ; v3(-970.42,-401.25) -960.57,-391.41 IC1.6 ; C9.1 C10.1
  Top w20: R8.1 -1068.46,-826.13 C4.2
  other v1: -1000,-183 -859.06,-177
  other v2: -377,-1019 -1344,-1013 -208,-1012 -77,-1001 -712,-1000 -712,-880 -1415,-848 -161,-785 -1247,-754 -495,-676 -1159,-644 -448.77,-574.73 -636.27,-499.73 -561.27,-499.73 -486.27,-499.73 -411.27,-499.73 -336.27,-499.73 -1304,-464 -598.77,-424.73 -523.77,-424.73 -448.77,-424.73 -298.77,-424.73 -1303,-348 -1418,-248 -737,-82 -1260,-40 -728,15 -402,19
  other v3: -1057.03,-574.48 -1013.72,-574.48 -927.11,-574.48 -883.8,-574.48 -1057.03,-531.17 -1013.72,-531.17 -970.42,-531.17 -927.11,-531.17 -883.8,-531.17 -1013.72,-487.87 -970.42,-487.87 -927.11,-487.87 -883.8,-487.87 -1057.03,-444.56 -1013.72,-444.56 -970.42,-444.56 -927.11,-444.56 -883.8,-444.56 -1013.72,-401.25 -927.11,-401.25 -883.8,-401.25
  other v4: -1118.06,-877 -1105,-815 -925.67,-805.46 -1196,-320 -1084,-281 -727,-270 -238.06,-259 -1093.06,-172 -87.06,-139 -782.68,-124 -87.06,-97 -87.06,-49 -87.06,-7
  other v5: -1089.06,-1001 -1049.06,-1001 -1089.06,-951 -1049.06,-951 -1232,-512 -1124.06,-55 -1084.06,-55 -1124.06,-5 -1084.06,-5
HA1: IC1.41 R3.2 | length 519.9
  Top w8: IC1.41 -806.2,-520.19 -737.83,-520.19 -706.02,-552 -655,-552 -463,-744 -445.06,-744 -401.43,-787.63 R3.2
HA2: IC1.36 R13.1 | length 393.1
  Top w8: IC1.36 -838.28,-649.28 v1(-838,-649) ; v1(-657,-658) -549.61,-765.39 -549.61,-772.31 R13.1
  Bottom w8: v1(-838,-649) -838,-647.94 -837,-646.94 -836.06,-646 -824.06,-658 v1(-657,-658)
HB1: IC1.1 R5.2 | length 343.9
  Top w8: IC1.1 -841.7,-306 -658.83,-306 -566.8,-213.97 R5.2
HB2: IC1.44 R15.1 | length 477.6
  Top w8: IC1.44 -730.35,-458.34 -708.8,-436.78 -658.24,-436.78 R15.1
LA1: IC1.39 R4.2 | length 360.9
  Top w8: IC1.39 -776.87,-556.76 -709,-624.63 -709,-708.7 -682.7,-735 -641.68,-735 -615,-761.68 -615,-772.5 R4.2
LA2: IC1.38 R14.1 | length 283.6
  Top w8: IC1.38 -810.1,-577.55 -831.04,-577.55 -842.62,-589.14 -842.62,-611.74 -747.69,-706.67 -747.69,-772.31 R14.1
LB1: IC1.47 R6.2 | length 355.9
  Top w8: v1(-849.06,-401) -847.34,-399.28 IC1.47 ; v1@-784.06,-169 -784.06,-197.48 R6.2
  Bottom w8: v1(-849.06,-401) -849.06,-231 v1(-784.06,-166)
LB2: IC1.46 R16.1 | length 306.9
  Top w8: IC1.46 v1(-770,-418.97) ; v1(-667.68,-264) -667.68,-246.48 R16.1
  Bottom w8: v1(-770,-418.97) -762.65,-418.97 -667.68,-324 v1(-667.68,-264)
NetC5_2: C5.2 IC1.34 | length 92.8
  Top w8: IC1.34 -901.52,-674.54 -864,-712.05 C5.2@-864,-726.54
NetC6_1: C6.1 IC1.31 | length 87.7
  Top w8: C6.1@-993.33,-721.54 -981.54,-721.54 -975,-715 -975,-692.2 -960.57,-677.77 IC1.31@-960.57,-654.28
NetC6_2: C6.2 IC1.32 | length 161.7
  Top w8: C6.2@-993.33,-788.46 -983.46,-788.46 -958.92,-763.92 -958.92,-695.92 -940.89,-677.89 IC1.32@-940.89,-654.28
NetD1_1: D1.1 R18.2 | length 84.8
  Top w12: D1.1 -1160.53,-261 -1165,-261 -1160,-256 R18.2
NetQ1_2: Q1.2 R13.2 | length 181.3
  Top w10: Q1.2 -458.06,-901 -436.01,-878.95 -436.01,-820.96 -467,-789.97 R13.2
NetQ1_4: Q1.4 R3.1 | length 307
  Top w10: Q1.4 -464.06,-1001 -387,-923.94 -387,-842.47 -334.5,-789.97 R3.1
NetQ2_2: Q2.2 R14.2 | length 159.2
  Top w10: Q2.2 -790,-901 -756,-867 -756,-830.93 R14.2
NetQ2_4: Q2.4 R4.1 | length 290.3
  Top w10: Q2.4 -770,-1001 -681.06,-912.06 -681.06,-802.63 R4.1
NetQ3_2: Q3.2 R15.2 | length 262.3
  Top w8: Q3.2 -520.38,-68 -473,-68 -425,-116 -425,-153.54 R15.2
NetQ3_4: Q3.4 R5.1 | length 86
  Top w8: Q3.4 -536.82,-149 -530,-155.83 -521.2,-155.83 -513,-164.03 -513,-198.87 R5.1
NetQ4_2: Q4.2 R16.2 | length 237.6
  Top w8: Q4.2 -837.38,-51 -808.47,-51 -715.06,-144.42 -715.06,-197.08 R16.2
NetQ4_4: Q4.4 R6.1 | length 65.4
  Top w10: Q4.4 -833.46,-154.91 R6.1@-833.46,-212
SA: Q2.1 Q2.3 R7.1 R11.1
SB: Q4.1 Q4.3 R9.1 R12.1 | length 93.9
  Top w8: R12.1 -906.54,-39.41 R9.1
SCK: IC1.14 P4.2 | length 309.3
  Top w8: P4.2 -1300.72,-399.28 IC1.14
SDI: IC1.15 P4.3 | length 276
  Top w8: P4.3 -1381.03,-418.97 IC1.15
SDO: IC1.16 P4.4 | length 293.6
  Top w8: P4.4 -1338.65,-438.65 IC1.16
SRAH: IC1.8 R7.2 | length 760.7
  Top w8: v1(-1004,-287) v1(-1004,-287) -999.94,-287.06 IC1.8 IC1.8@-1001,-325.39 ; v1(-969.06,-831) -969.06,-833.72 -954.15,-848.62 -954.15,-860.31 R7.2
  Bottom w8: v1(-1004,-287) -1005.74,-287 -1122.95,-404.21 -1122.95,-674.86 -969.06,-828.76 v1(-969.06,-831)
SRAL: IC1.7 R8.2 | length 818.7
  Top w8: R8.2 -988.06,-862.52 -997.06,-853.52 v1(-997.06,-830.46) ; IC1.7 -980.26,-293.26 v1(-976,-289)
  Bottom w8: v1(-997.06,-830.46) -1136.95,-690.56 -1136.95,-390.25 -1012.7,-266 -991.3,-266 -980,-277.3 -980,-281.21 -976,-285.21 v1(-976,-289)
SRBH: IC1.9 R9.2 | length 237.5
  Top w8: IC1.9 -1020.94,-325.13 -1020.94,-299.75 -1034,-286.7 -1034,-186.62 -973.46,-126.09 R9.2
SRBL: IC1.10 R10.2 | length 218.9
  Top w8: IC1.10 -1039.31,-301.71 -1048,-293.02 -1048,-141.46 R10.2
STEP: IC1.17 P3.2 | length 612.7
  Top w8: P3.2 -1335.6,-835.6 -1335.6,-559.8 -1234.14,-458.34 IC1.17
VCC: C4.1 IC1.29 R17.2 | length 187.6
  Top w12: R17.2@-1116.67,-747.07 C4.1 -1046.07,-747.07 -1026.99,-727.99 -1026.99,-701.88 -1019.96,-694.85 -1019.85,-694.85 -999.94,-674.94 IC1.29
VCC_IO: C1.1 IC1.20 IC1.21 IC1.22 P2.2 R18.1 | length 981.7
  Top w8: -1160.39,-541 -1160.39,-527.39 -1150.39,-517.39 IC1.20 ; -1160,-556.76 -1160,-540.61 -1156.39,-537 ; IC1.21 IC1.21@-1130.64,-538.27
  Top w10: v1(-1264,-138) -1190,-138 -1168.54,-116.54 R18.1
  Top w12: C1.1@-1189.39,-570 -1160.39,-541 -1160,-540.61 ; C1.1@-1174,-556.76 -1160,-556.76 IC1.22@-1148.46,-556.76 ; -1156.39,-537 IC1.21@-1127.83,-537
  Top w20: v1(-1228,-570) C1.1@-1189.39,-570
  VM w20: P2.2 -1359,0 -1264,-95 v1(-1264,-138) -1264,-534 v1(-1228,-570)

## Polygon pours and split planes (outlines as drawn)
GND on Top "GND_L01_P035" (solid, remove dead copper, pour order 97): -1450,-1010.63 -1450,10.63 cw(c-1410.63,10.63) -1410.63,50 10.63,50 cw(c10.63,10.63) 50,10.63 50,-1010.63 cw(c10.63,-1010.63) 10.63,-1050 -1410.63,-1050 cw(c-1410.63,-1010.63)
BMB1 on Top "BMB1_L01_P035" (solid, pour order 92): -695.24,-78 -702.05,-84.81 -702.06,-167 -693.05,-176 -479.06,-176 -469.06,-166 -469.06,-86 -477.05,-78
+VM on Top "+VM_L01_P038" (solid, pour order 95): -344.12,-1050 -344.12,-815 -239,-815 -239,-1050
BMA1 on Top "BMB1_L01_P035" (solid, pour order 91): -661.24,-931 -667.05,-936.81 -667.06,-1019 -658.05,-1028 -444.06,-1028 -434.06,-1018 -434.06,-938 -441.05,-931
BMB2 on Top "BMB1_L01_P035" (solid, pour order 89): -693.24,24 -702.05,15.19 -702.06,-67 -697.06,-72 -475.05,-72 -469.06,-66 -469.06,14 -479.06,24
SB on Top "SB_L01_P043" (solid, pour order 93): -938.06,32 -938.06,-149 -865.06,-149 -865.06,-119 -825.05,-119 ccw(c-825.05,-92.22) -798.28,-92.22 -798.28,32
SA on Top "SA_L01_P042" (solid, pour order 96): -905.06,-1050 -905.06,-851.05 -870.16,-816.15 -786.64,-816.15 -761.06,-841.74 -761.06,-1050
BMA2 on Top "BMB1_L01_P035" (solid, pour order 90): -658.24,-828 -667.05,-836.81 -667.06,-919 -662.06,-924 -440.05,-924 -434.06,-918 -434.06,-838 -444.06,-828
+VM on Top "+VM_L01_P038" (solid, pour order 94): -384,50 -384,-171 -370,-185 -197.68,-185 -197.68,50
+VM on Top "+VM_L01_P039" (solid, pour order 87): -921.2,-649.28 -947,-675.08 -947,-731 -905,-731 -904,-730 -904,-666.49
+VM on Top "+VM_L01_P037" (solid, pour order 88): -921.2,-326.45 -926.55,-326.45 -935,-318 -935,-239 -921,-225 -884,-225 -879,-230 -879,-279 -890.23,-290.23 -890.23,-295.47
GND on Bottom "GND_L04_P039" (solid, remove dead copper, pour order 108): -1450,-1010.63 -1450,10.63 cw(c-1410.63,10.63) -1410.63,50 10.63,50 cw(c10.63,10.63) 50,10.63 50,-1010.63 cw(c10.63,-1010.63) 10.63,-1050 -1410.63,-1050 cw(c-1410.63,-1010.63)
BMB2 on Bottom "BMB2_L04_P107" (solid, pour order 107): 50,-154 -357.32,-154 -379.05,-132.27 -379.06,-32.63 -435.68,24 -495.68,24 -475.06,3.37 -475.05,-171.63 -402.68,-244 50,-244
BMA1 on Bottom "BMA1_L04_P106" (solid, pour order 106): 50,-546 -69.68,-546 -344,-820.32 -344,-930 -443,-1029 -607.68,-1029 -442.68,-864 -442.68,-794 -104.69,-456 50,-456
BMA2 on Bottom "BMA2_L04_P105" (solid, pour order 105): -440,-844.36 -440,-782.13 -107.37,-449.51 49.49,-449.51 50,-449 50,-354 -144.72,-354 -618.72,-828 -658.24,-828 -585.24,-901 -494.68,-901 -467.68,-874
BMA1 on Bottom "BMB1_L01_P035" (solid, pour order 102): -661.24,-931 -667.05,-936.81 -667.06,-1019 -658.05,-1028 -444.06,-1028 -434.06,-1018 -434.06,-938 -441.05,-931
BMA2 on Bottom "BMB1_L01_P035" (solid, pour order 101): -658.24,-828 -667.05,-836.81 -667.06,-919 -662.06,-924 -507.68,-924 -440,-856.31 -440,-832.06 -444.06,-828
BMB2 on Bottom "BMB1_L01_P035" (solid, pour order 100): -693.24,24 -702.05,15.19 -702.06,-67 -697.06,-72 -475.05,-72 -469.06,-66 -469.06,14 -479.06,24
BMB1 on Bottom "BMB1_L01_P035" (solid, pour order 104): -695.24,-78 -702.05,-84.81 -702.06,-167 -693.05,-176 -479.06,-176 -469.06,-166 -469.06,-86 -477.05,-78
BMB1 on Bottom "BMB1_L04_P103" (solid, pour order 103): -702.06,-166.91 -519.97,-349 50,-349 50,-249 48.51,-250.49 -402.68,-250.49 -469.06,-184.12 -469.06,-147
GND on VM "GND_L03_P109" (solid, pour order 109): -589,-1050 -589,50 -1410.63,50 ccw(c-1410.63,10.63) -1450,10.63 -1450,-1010.63 ccw(c-1410.63,-1010.63) -1410.63,-1050
+VM on VM "+VM_L03_P050" (solid, pour order 99): -811,-1050 -811,50 10.63,50 cw(c10.63,10.63) 50,10.63 50,-1010.63 cw(c10.63,-1010.63) 10.63,-1050
GND on GND "GND_L02_P037" (solid, pour order 98): -1450,-1010.63 -1450,10.63 cw(c-1410.63,10.63) -1410.63,50 10.63,50 cw(c10.63,10.63) 50,10.63 50,-1010.63 cw(c10.63,-1010.63) 10.63,-1050 -1410.63,-1050 cw(c-1410.63,-1010.63)

## Keep-outs
Keep-Out Layer:
  the board outline again, w4

## Silkscreen, mask and mechanical layers (free items; w line width, h text height)
Top Overlay:
  text "VCC_IO" at -1324.16,-19.99 h40
  text "VS" at -65,-26.66 h32 r90
  text "GND" at -1324,-119.99 h40
  text "GND" at -65,-142.65 h32 r90
  text "CSN" at -1325,-219.99 h40
  text "B2" at -171,-219.99 h40
  text "SCK" at -1325,-319.99 h40
  text "B1" at -157.67,-319.99 h40
  text "SDI" at -1325,-419.99 h40
  text "A2" at -171,-419.99 h40
  text "SDO" at -1325,-519.99 h35
  text "A1" at -157.67,-519.99 h40
  text "V'.BoardVersion'" at -495,-558.31 h35 r90
  text "GND" at -170.63,-619.99 h40
  text "DIAG0" at -1325,-652.99 h40
  text "'.BoardName'" at -556.74,-683.69 h35 r90
  text "DIAG1" at -1325,-719.99 h40
  text "GND" at -170.63,-719.99 h40
  text "DRV_ENN" at -1327,-822 h35
  text "DCIN" at -203.95,-859.99 h40
  text "STEP" at -1325,-919.99 h40
  text "DCEN" at -210.62,-939.99 h40
  text "DIR" at -1325,-1019.99 h40
  text "DCO" at -170.63,-1019.99 h40
Bottom Overlay:
  lines w8: -50,-550 -50,-150
  text "VCC_IO" at -1104.07,-19.99 h40
  text "VS" at -73.37,-20 h40
  text "GND" at -1218.37,-119.99 h40
  text "GND" at -73.37,-120 h40
  text "CSN" at -1218.37,-219.99 h40
  text "B2" at -67,-219.99 h40
  text "SCK" at -1218.37,-319.99 h40
  text "B1" at -69,-319.99 h40
  text "SDI" at -1231.7,-419.99 h40
  text "A2" at -76,-419.99 h40
  text "SDO" at -1218.37,-519.99 h40
  text "A1" at -76,-519.99 h40
  text "DIAG0" at -1145.06,-619.99 h40
  text "GND" at -76,-619.99 h40
  text "DIAG1" at -1158.39,-719.99 h40
  text "GND" at -76,-719.99 h40
  text "V.BoardVersion" at -933.68,-749 h50
  text ".BoardName" at -360.68,-749 h50
  text "Chip: TMC2160-TA" at -353.68,-819 h60
  text "DRV_ENN" at -1058.42,-819.99 h40
  text "DCIN" at -76,-819.99 h40
  text "VSupply: 9…36V" at -353.68,-889 h60
  text "STEP" at -1178.38,-919.99 h40
  text "DCEN" at -76,-919.99 h40
  text "Iphase, RMS: 2.8A" at -353.68,-959 h60
  text "DIR" at -1225.03,-1019.99 h40
  text "DCO" at -76,-1019.99 h40
TopAsm:
  text ".BoardName" at -1327.21,-191.31 h40 r270
  text ".BoardVersion" at -1333.88,-654 h40 r270

## Dimensions
10.63,-1050 to 10.63,50 on Dimension
-1450,10.63 to 50,10.63 on Dimension